# Altium PCB Valve.PcbDoc
Units mm, origin at the board's own origin, x right, y up, seen from the top; angles counter-clockwise.
Board outline 88.9 x 86.99 mm, 2 copper layers (Top Layer, Bottom Layer); 19 components, 24 nets, 64 pads, 0 vias.
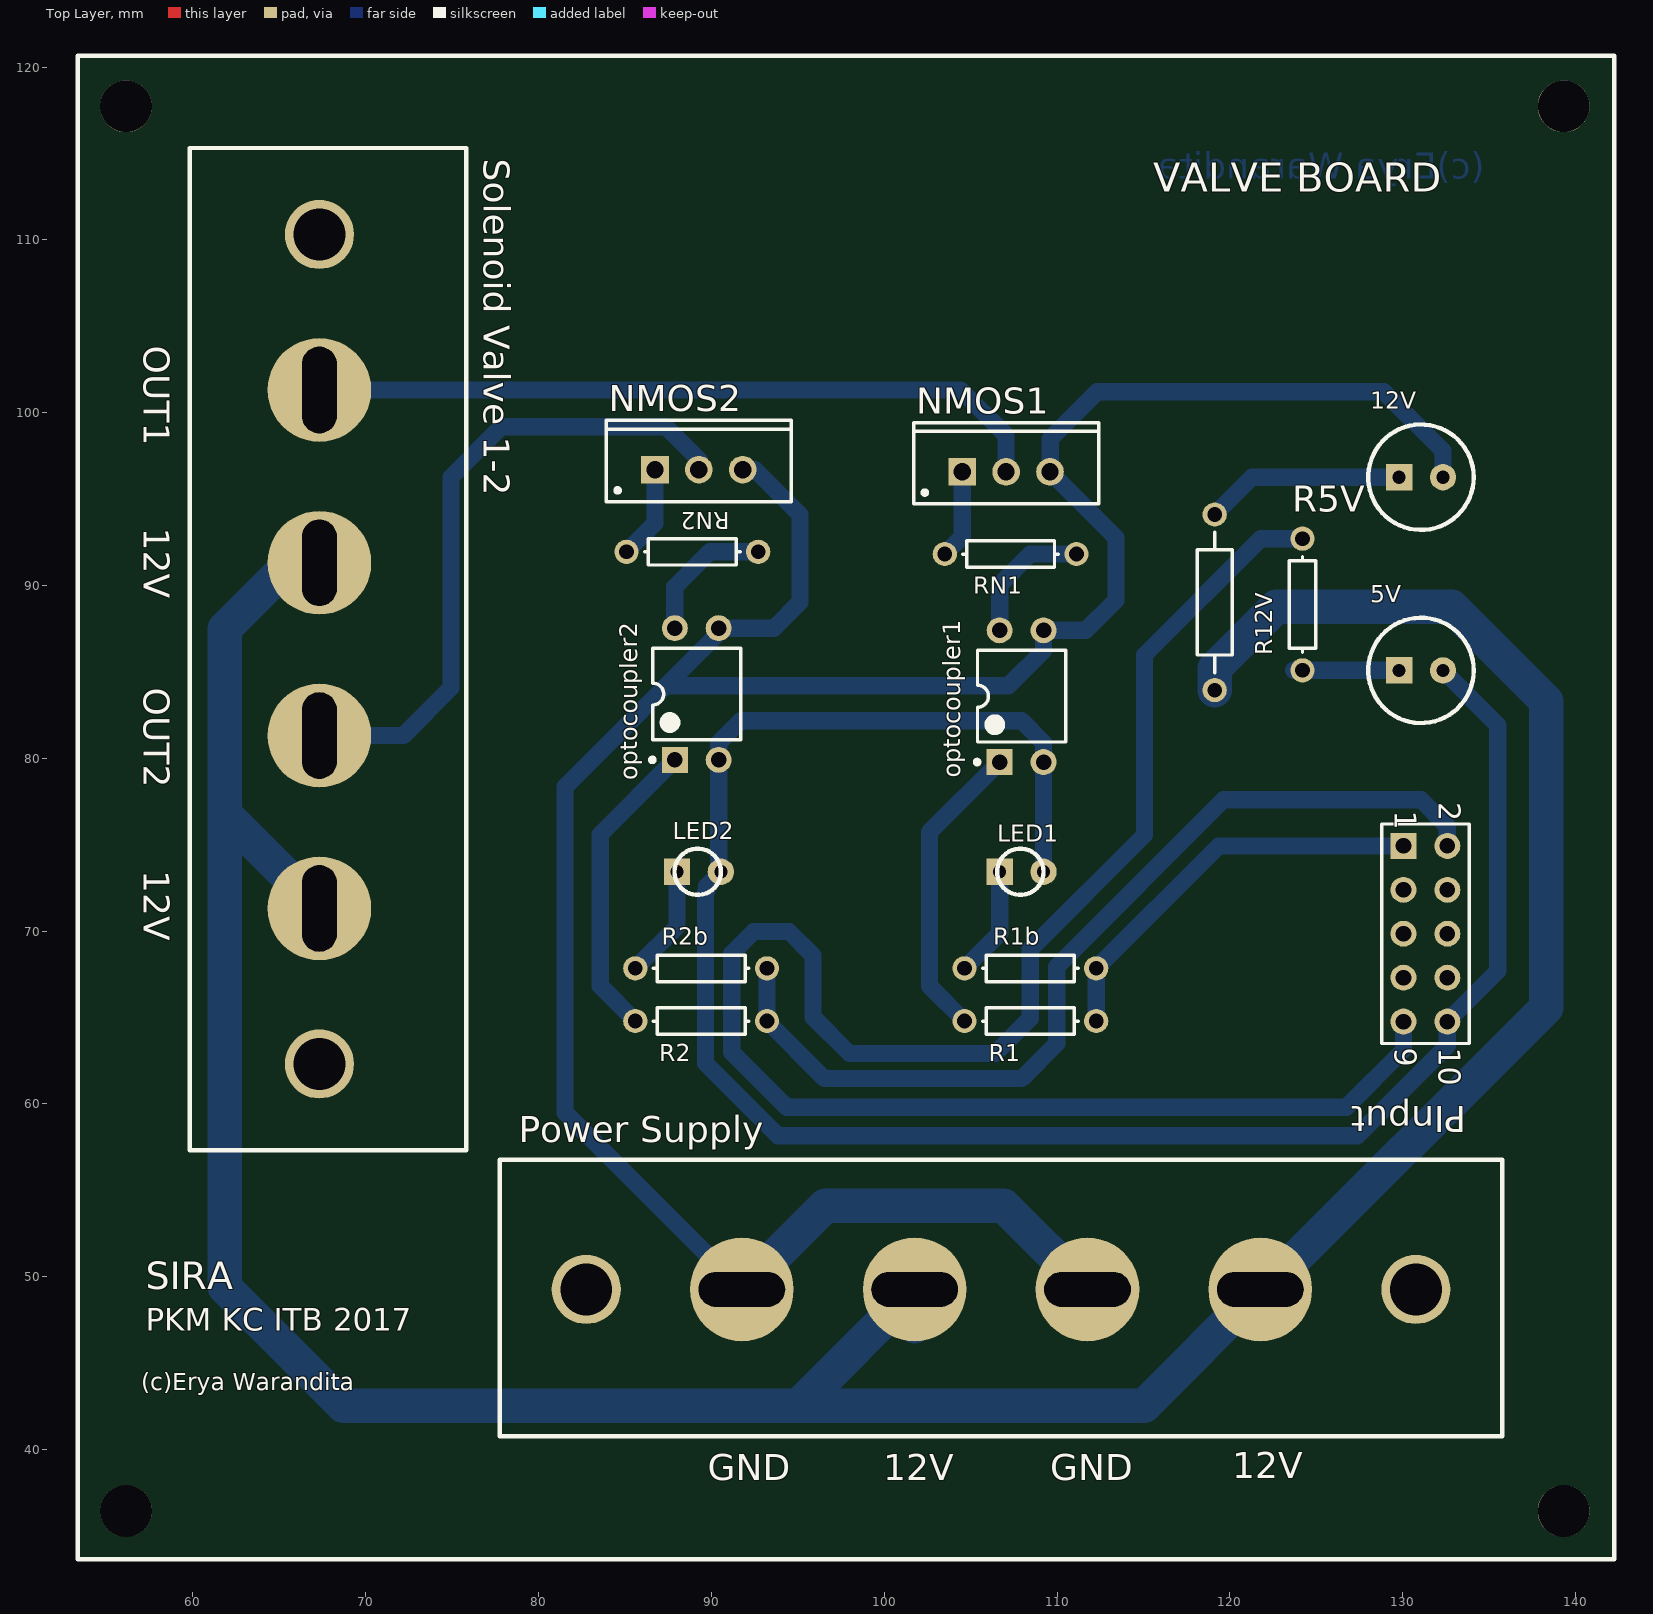
[diagram p0: Top Layer view]
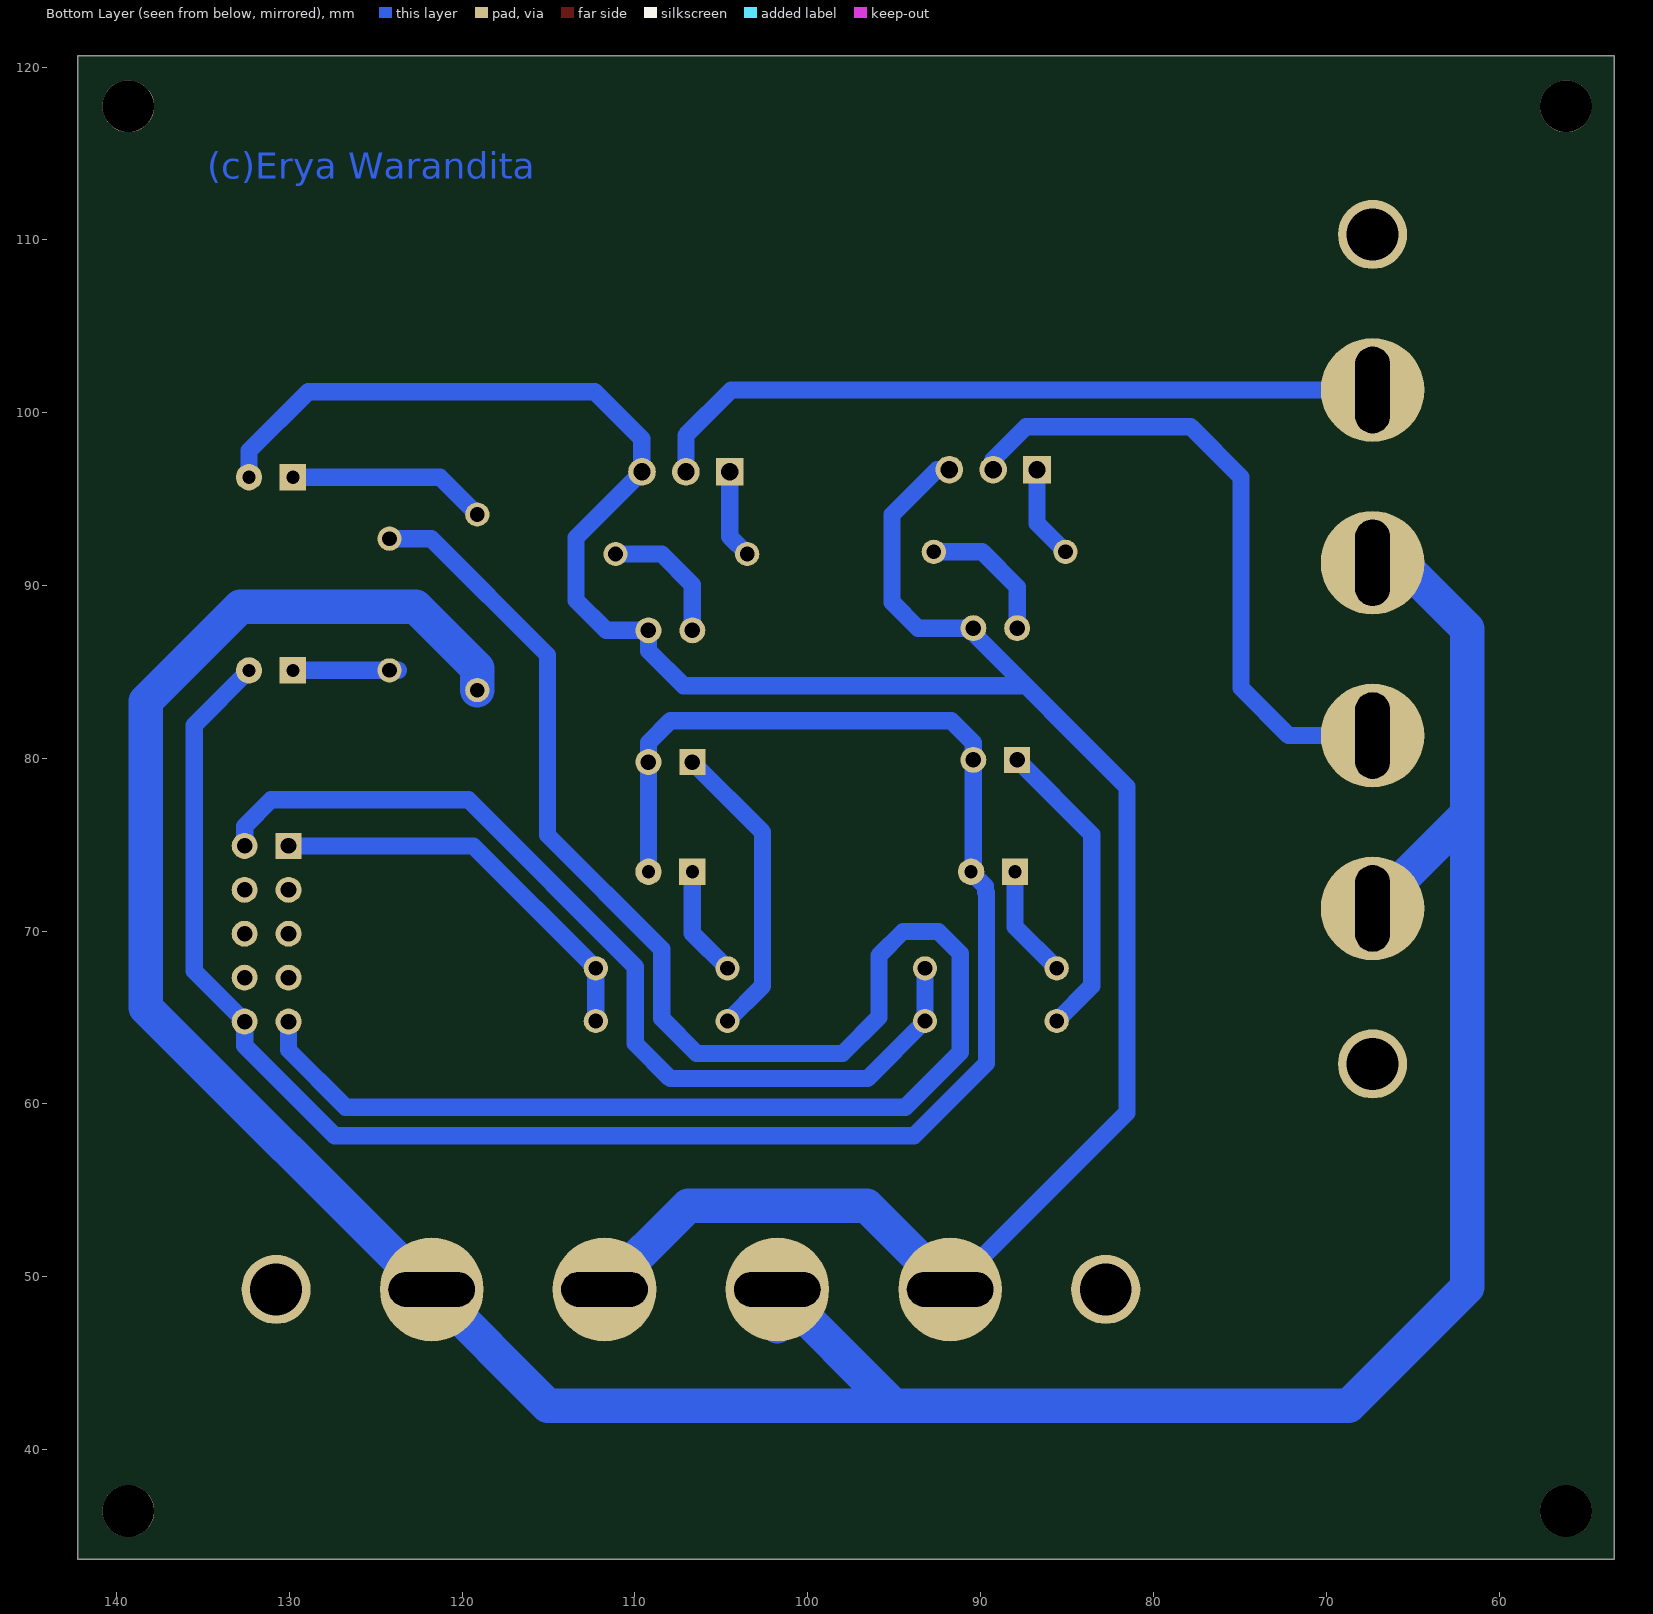
[diagram p1: Bottom Layer view, seen from below]

## Layer stack, top to bottom
Top Solder: solder mask 0.0102, Solder Resist, Dk 3.5
Top Layer: signal copper 0.0356
Dielectric 1: dielectric 0.32, FR-4, Dk 4.8
Bottom Layer: signal copper 0.0356
Bottom Solder: solder mask 0.0102, Solder Resist, Dk 3.5

## Board outline
53.34,33.655 142.24,33.655 142.24,120.65 53.34,120.65

## Design rules (kind name [scope] priority, off if disabled: settings)
Clearance [All] p1: gap=0.45
PolygonConnect [All] p1: connectstyle=Relief reliefconductorwidth=0.254 reliefentries=4 polygonreliefangle="90 Angle" airgapwidth=0.254
RoomDefinition Valve [InComponentClass('Valve')] p1: confinementstyle=ConfineIn formatcopy=TRUE lockcomponents=FALSE outline 53.34,33.603 142.24,33.603 142.24,120.65 53.34,120.65
RoutingVias [All] p1: holewidth=0.711 width=1.27 viastyle="Through Hole" minholewidth=0.711 minwidth=1.27 maxholewidth=0.711 maxwidth=1.27
SolderMaskExpansion [All] p1: expansion=0.102
Width [All] p1: maxlimit=3 minlimit=0.254 preferedwidth=1
30 further rules are at their usual default settings.

## Components (designator, comment, footprint, x,y, rotation, side; value= is the part's Value field where it differs from the comment)
5V "LED sedang" "LED sedang" 134.874,85.09 r0 top
12V "LED sedang" "LED sedang" 134.874,96.266 r0 top
LED1 "LED kecil" "LED kecil" 109.22,75.974 r0 top
LED2 "LED kecil" "LED kecil" 90.551,75.974 r0 top
NMOS1 "NMOS-2" TO-220AB 107.054,96.578 r0 top
NMOS2 "NMOS-2" TO-220AB 89.274,96.705 r0 top
optocoupler1 "Optoisolator1" DIP-4 107.95,83.594 r90 top
optocoupler2 "Optoisolator1" DIP-4 89.154,83.721 r90 top
PInput "Header 5X2" HDR2X5 130.048,74.93 r270 top
"Power Supply" "Terminal Blok 4 kaki Besar" "TERMINAL 4 KAKI" 135.763,56.769 r180 top (schematic designator "Terminal 4 kaki 1")
R1 "Res1" AXIAL-0.3 108.458,64.798 r180 top
R1b "Res1" AXIAL-0.3 108.458,67.846 r0 top
R2 "Res1" AXIAL-0.3 89.408,64.798 r180 top
R2b "Res1" AXIAL-0.3 89.408,67.846 r0 top
R5V "Res1" AXIAL-0.3 124.206,88.9 r90 top
R12V "Res2" AXIAL-0.4 119.126,89.027 r270 top (schematic designator R24V)
RN1 "Res1" AXIAL-0.3 107.315,91.821 r180 top
RN2 "Res1" AXIAL-0.3 88.9,91.948 r180 top
"Solenoid Valve 1-2" "Terminal Blok 4 kaki Besar" "TERMINAL 4 KAKI" 59.817,115.316 r270 top

## Footprints (in the part's own frame and the unit in brackets; to place one, negate y for a bottom-side part, rotate by r counter-clockwise, add the part's x,y. Pads: shape width x height; smd on the part's side, far side on the other; paste and mask are expansions set on the pad)
AXIAL-0.3 [mm] "Axial Device, Thru-Hole; 2 Leads; 0.3 in Pin Spacing"
  round 1.4 hole 0.85: 1(-3.81,0) 2(3.81,0)
  silkscreen extent -2.77,-0.76 2.77,0.76
AXIAL-0.4 [mm] "Axial Device, Thru-Hole; 2 Leads; 0.4 in Pin Spacing"
  round 1.4 hole 0.85: 1(-5.08,0) 2(5.08,0)
  silkscreen extent -4.06,-1.02 4.06,1.02
DIP-4 [mm] "DIP; 4 Leads; Row Spacing 7.62 mm; Pitch 2.54 mm"
  rect 1.5x1.5 hole 0.9: 1(-3.81,1.27)
  round 1.5 hole 0.9: 2(-3.81,-1.27) 3(3.81,-1.27) 4(3.81,1.27)
  silkscreen extent -3.93,-2.55 2.65,2.69, body extent -3.15,-2.5 3.15,2.5, height 5.6
HDR2X5 [mm] "Connector; Header; 5x2 Position"
  rect 1.5x1.5 hole 0.9: 1(0,0)
  round 1.5 hole 0.9: 2(0,2.54) 3(2.54,0) 4(2.54,2.54) 5(5.08,0) 6(5.08,2.54) 7(7.62,0) 8(7.62,2.54) 9(10.16,0) 10(10.16,2.54)
  silkscreen extent -1.27,-1.27 11.43,3.81
"LED kecil" [mil]
  rect 60x60 hole 30: 1(-100,-100)
  round 60 hole 30: 2(0,-100)
  silkscreen extent -106,-153 0,-47
"LED sedang" [mil]
  rect 60x60 hole 30: 1(-200,0)
  round 60 hole 30: 2(-100,0)
  silkscreen extent -270,-120 -30,120
"TERMINAL 4 KAKI" [mm] "TERMINAL HITAM 4 KAKI"
  round 6 hole 2 slot 5 at 0 deg: 1(14,7.5) 2(24,7.5) 3(34,7.5) 4(44,7.5)
  round 4 hole 3: " "(5,7.5) " "(53,7.5)
  silkscreen extent 0,0 58,16
TO-220AB [mm] "TO, Thru-Hole, Vertical, Heatsink Mounted; 3 In-Line Leads; Pitch 2.54 mm"
  rect 1.6x1.6 hole 1: 1(-2.54,0)
  round 1.6 hole 1: 2(0,0) 3(2.54,0)
  silkscreen extent -5.35,-1.85 5.35,2.85, body extent -5.4,-1.9 5.4,2.9, height 19.3

## Part data
NMOS1 NMOS2: "N-Channel Power MOSFET"
optocoupler1 optocoupler2: "4-Pin Phototransistor Optocoupler"
PInput: "Header, 5-Pin, Dual row"
"Power Supply" "Solenoid Valve 1-2": library part "Terminal Blok 4 kaki"
R1 R1b R2 R2b R5V R12V RN1 RN2: "Resistor"

## Free pads (board coordinates)
  round 3 hole 3: 2(56.134,36.449) 2(56.134,117.729) 2(139.319,36.449) 2(139.319,117.729)

## Nets (pads, with @x,y where several pads share a name; then routed paths per layer and width w, separated by ;. In a path a pad name is that pad's centre, name@x,y a point inside that pad or via, vN(x,y) a via of type N, cw(c..) or ccw(c..) an arc to the next point about the centre after c; other vN are vias at no path point)
1: PInput.1 R1.1 R1b.2 | length 23.8
  Bottom Layer w1: R1.1 R1b.2 119.352,74.93 PInput.1
2: PInput.2 R2.1 R2b.2 | length 54.9
  Bottom Layer w1: R2b.2 R2.1 96.548,61.468 107.95,61.468 109.982,63.5 109.982,67.945 119.634,77.597 131.064,77.597 132.588,76.073 PInput.2
3: PInput.3
4: PInput.4
5: PInput.5
6: PInput.6
7: PInput.7
8: PInput.8
GND: 5V.2 LED1.2 LED2.2 optocoupler1.2 optocoupler2.2 PInput.10 | length 117.2
  Bottom Layer w1: LED2.2@90.424,73.561 optocoupler2.2 90.424,80.899 91.694,82.169 107.95,82.169 109.22,80.899 optocoupler1.2 LED1.2 ; LED2.2 89.723,72.606 89.723,72.278 89.662,72.217 89.662,62.357 93.853,58.166 127.381,58.166 132.588,63.373 PInput.10 135.509,67.691 135.509,81.915 5V.2
GND2: 12V.2 "Power Supply.2" "Power Supply.4" NMOS1.3 NMOS2.3 optocoupler1.3 optocoupler2.3 | length 151.5
  Bottom Layer w1: 87.376,84.201 107.188,84.201 109.22,86.233 optocoupler1.3 111.661,87.404 113.411,89.154 113.411,92.761 NMOS1.3 109.601,96.585 109.601,98.49 112.33,101.219 128.905,101.219 132.334,97.79 12V.2 ; 91.763,49.269 81.534,59.498 81.534,78.359 90.424,87.249 optocoupler2.3 93.627,87.531 95.123,89.027 95.123,94.107 92.525,96.705 NMOS2.3
  Bottom Layer w2: 91.763,49.269 96.596,54.102 106.93,54.102 111.763,49.269
Net5V_1: 5V.1 R5V.1 | length 6.1
  Bottom Layer w1: R5V.1@123.698,85.09 5V.1
Net12V_1: 12V.1 R12V.1 | length 11.6
  Bottom Layer w1: R12V.1 121.285,96.266 12V.1
NetLED1_1: LED1.1 R1b.1 | length 6.4
  Bottom Layer w1: R1b.1 106.68,69.878 LED1.1
NetLED2_1: LED2.1 R2b.1 | length 6.6
  Bottom Layer w1: R2b.1 88.011,70.259 LED2.1
NetNMOS1_1: NMOS1.1 RN1.2 | length 5.2
  Bottom Layer w1: RN1.2 104.514,92.83 NMOS1.1
NetNMOS2_1: NMOS2.1 RN2.2 | length 5.4
  Bottom Layer w1: RN2.2 86.734,93.592 NMOS2.1
Netoptocoupler1_1: optocoupler1.1 R1.2 | length 17.5
  Bottom Layer w1: R1.2 102.616,66.83 102.616,75.72 optocoupler1.1
Netoptocoupler2_1: optocoupler2.1 R2.2 | length 17.7
  Bottom Layer w1: R2.2 83.566,66.83 83.566,75.593 optocoupler2.1
NMOS1: optocoupler1.4 RN1.1 | length 7.8
  Bottom Layer w1: optocoupler1.4 106.68,90.043 108.458,91.821 RN1.1
NMOS2: optocoupler2.4 RN2.1 | length 8.1
  Bottom Layer w1: optocoupler2.4 87.884,89.916 89.916,91.948 RN2.1
SV1: "Solenoid Valve 1-2.1" NMOS1.2 | length 42.9
  Bottom Layer w1: 67.317,101.316 104.424,101.316 107.054,98.686 NMOS1.2
SV2: "Solenoid Valve 1-2.3" NMOS2.2 | length 37.9
  Bottom Layer w1: 67.317,81.316 72.172,81.316 74.93,84.074 74.93,96.266 77.851,99.187 87.376,99.187 89.274,97.289 NMOS2.2
VCC: PInput.9 R5V.2 | length 108.3
  Bottom Layer w1: R5V.2 121.793,92.71 115.062,85.979 115.062,75.565 108.458,68.961 108.458,64.95 106.426,62.918 97.991,62.918 95.885,65.024 95.885,68.58 94.488,69.977 92.456,69.977 91.186,68.707 91.186,62.992 94.361,59.817 126.746,59.817 130.048,63.119 PInput.9
VCC2: "Power Supply.1" "Power Supply.3" "Solenoid Valve 1-2.2" "Solenoid Valve 1-2.4" R12V.2 | length 195.3
  Bottom Layer w1: 65.662,91.316 67.317,91.316
  Bottom Layer w2: 65.662,91.316 61.849,87.503 61.849,76.784 ; 67.317,71.316 61.849,76.784 ; 101.763,47.153 101.763,49.269 95.039,42.545 ; R12V.2 119.126,85.217 122.682,88.773 132.842,88.773 138.303,83.312 138.303,65.568 122.004,49.269 121.763,49.269 115.039,42.545 95.039,42.545 ; 61.849,76.784 61.849,49.403 68.707,42.545 95.039,42.545
pads on no net: "Power Supply. " "Solenoid Valve 1-2. "

## Other copper
Bottom Layer:
  text "(c)Erya Warandita" at 134.747,113.538 h1.52

## Silkscreen, mask and mechanical layers (free items; w line width, h text height)
Top Overlay:
  the board outline again, w0.254
  text "VALVE BOARD" at 115.57,112.776 h1.7
  text "OUT1" at 57.15,103.886 h1.52 r270
  text "12V" at 57.15,93.345 h1.52 r270
  text "OUT2" at 57.15,84.074 h1.52 r270
  text "12V" at 57.15,73.533 h1.52 r270
  text "SIRA" at 57.277,49.276 h1.6
  text "PKM KC ITB 2017" at 57.277,46.863 h1.3
  text "(c)Erya Warandita" at 57.023,43.434 h1
  text "12V" at 120.142,38.354 h1.52
  text "GND" at 89.789,38.227 h1.52
  text "12V" at 99.949,38.227 h1.52
  text "GND" at 109.601,38.227 h1.52

## Text inside footprints (layer, text, board x,y; h text height)
PInput: Top Overlay "10" at 132.08,63.246 h1.27 r270; Top Overlay "9" at 129.54,63.246 h1.27 r270; Top Overlay "1" at 129.54,76.962 h1.27 r270; Top Overlay "2" at 132.08,77.47 h1.27 r270